# EAGLE board HighVoltageOutput (EAGLE 9.0.1)
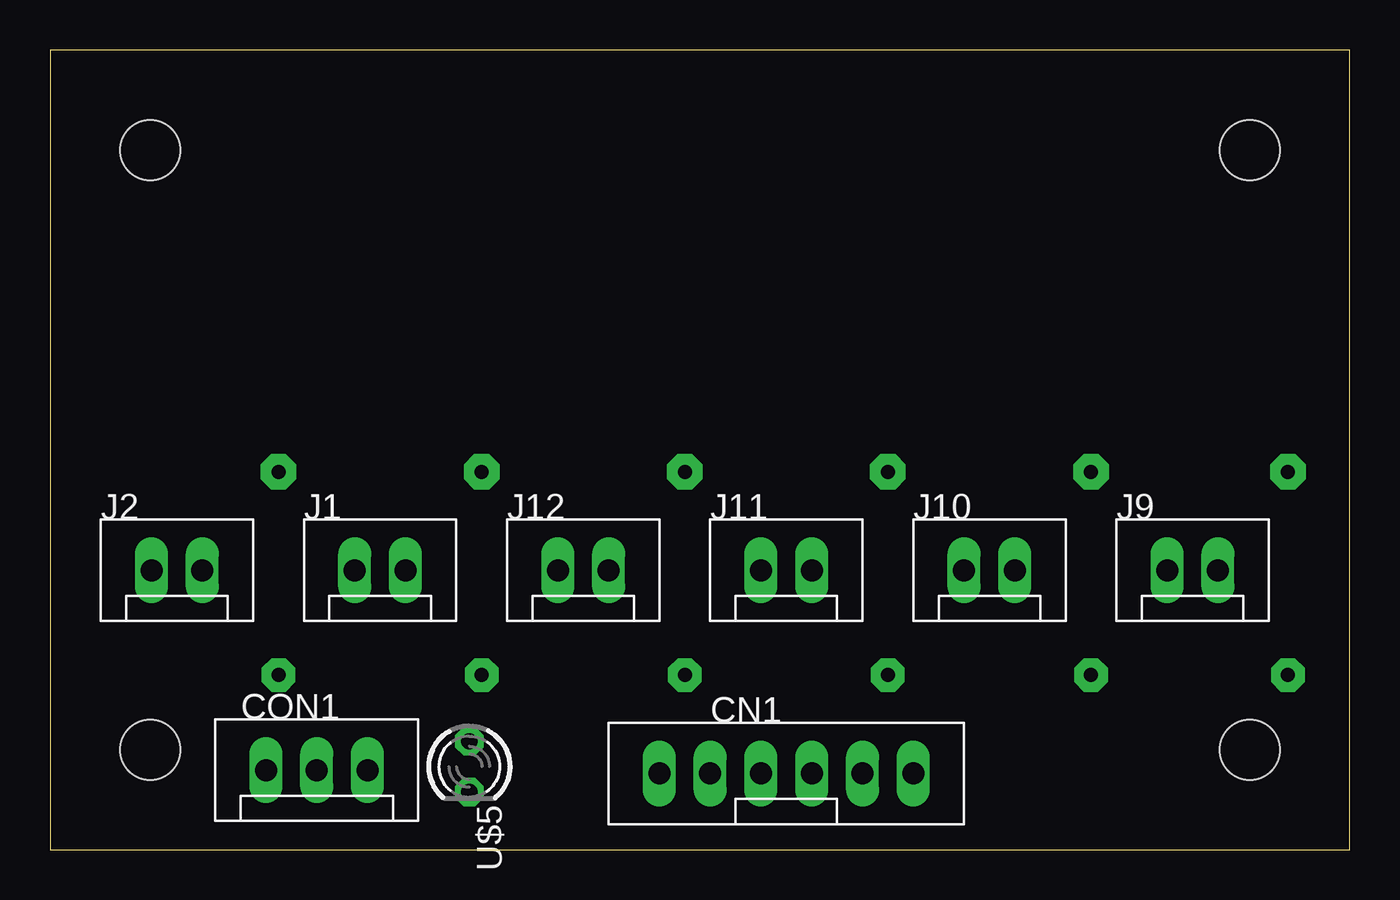
[diagram p0: board, top side]
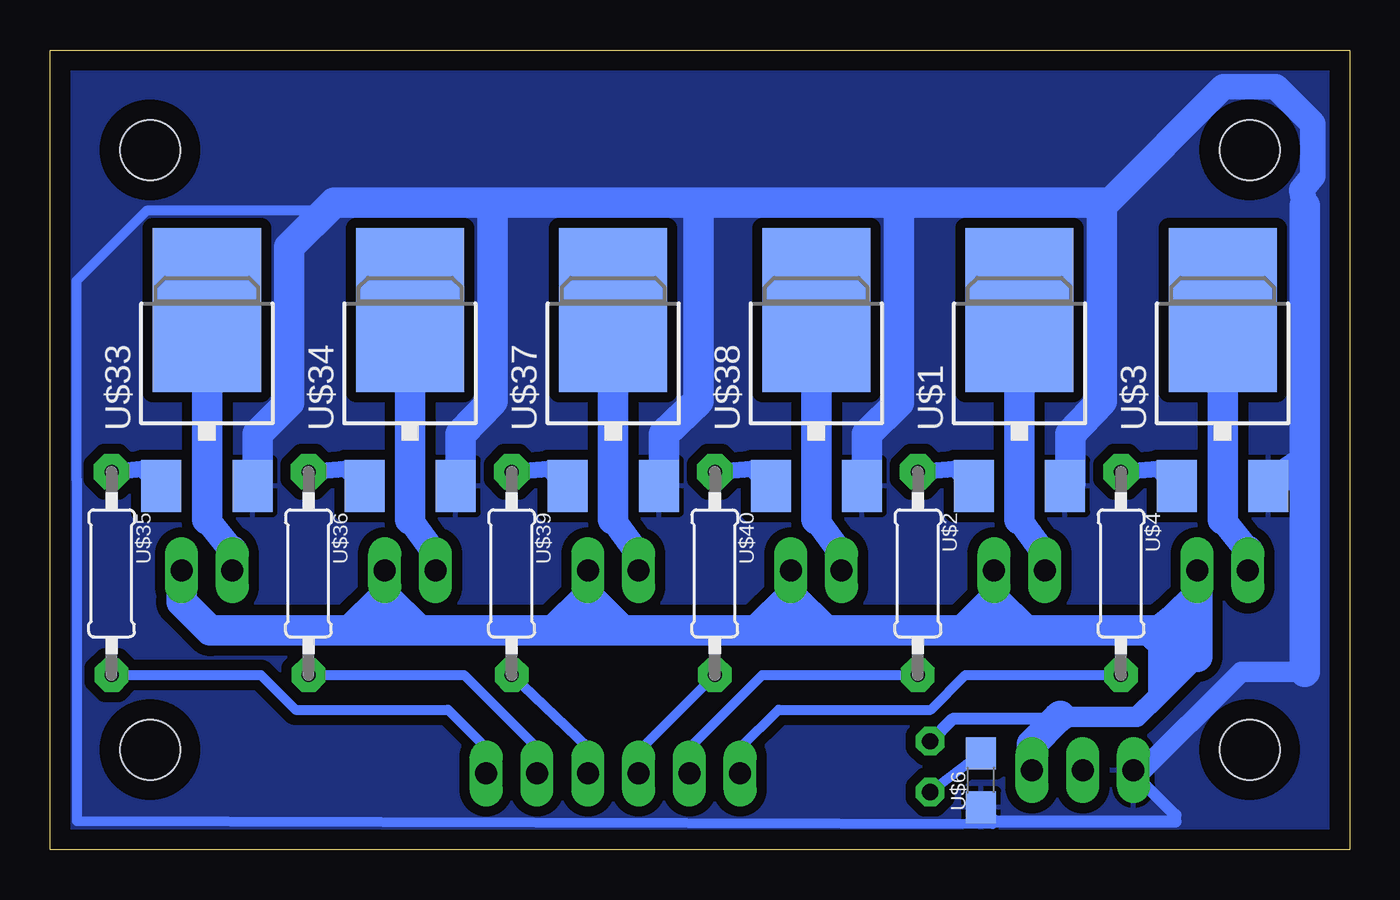
[diagram p1: board, bottom side, seen from below]

Size 65 x 40 mm. Coordinates in mm from the lower left corner, seen from the top.
Outline: 0,0 65,0 65,40 0,40 0,0
Copper layers (1*16): Top 0.035mm / dielectric 1.5mm / Bottom 0.035mm
Design rules "default *": minimum track width 6mil, minimum drill 0.35mm, track to track 20mil, track to pad 20mil, pad to pad 20mil, via to via 20mil, smd to smd 6mil, copper to edge 40mil, drill to drill 6mil, minimum pad ring 10mil, minimum via ring 8mil, stop-mask expansion 4mil, vias tented up to drill 0mil, thermal gap 10mil
Holes 3 mm at 5,5 60,5 60,35 5,35

## Footprints (pad centres in the part's own frame; a part is rotated, then mirrored left to right if it is on the bottom)
CON6 = drill 1.1 long: P$1 6.35,0; P$2 3.81,0; P$3 1.27,0; P$4 -1.27,0; P$5 -3.81,0; P$6 -6.35,0
CON3 = drill 1.1 long: P$1 2.54,0; P$2 0,0; P$3 -2.54,0
CON2 = drill 1.1 long: P$1 1.27,0; P$2 -1.27,0
TO-252FORHAND = smd 2 x 2.6: 1 -2.28,-5.3; 2 2.28,-5.3 | smd 5.4 x 8.2: 3 0,3.5
1/4W-H4_(0207/10) = drill 0.7 pad 1.778 octagon: 1 -5.08,0 | drill 0.7 pad 1.676 octagon: 2 5.08,0
LED3MM = drill 0.813 pad 1.422 octagon: A -1.27,0; K 1.27,0
0805(JIS2012)HAND = smd 1.6 x 1.5: 1 -1.35,0; 2 1.35,0

## Placement (x,y rotation side)
CN1  CON6  [CON6]  36.83,3.81 0 top
CON1  CON3  [CON3]  13.34,3.97 0 top
J1  CON2  [CON2]  16.51,13.97 0 top
J2  CON2  [CON2]  6.35,13.97 0 top
J9  CON2  [CON2]  57.15,13.97 0 top
J10  CON2  [CON2]  46.99,13.97 0 top
J11  CON2  [CON2]  36.83,13.97 0 top
J12  CON2  [CON2]  26.67,13.97 0 top
U$1  TO-252(MOS-FET_N)TO-252FORHAND  [TO-252FORHAND]  16.51,23.48 0 bottom
U$2  330  [1/4W-H4_(0207/10)]  21.59,13.81 270 bottom
U$3  TO-252(MOS-FET_N)TO-252FORHAND  [TO-252FORHAND]  6.35,23.48 0 bottom
U$4  330  [1/4W-H4_(0207/10)]  11.43,13.81 270 bottom
U$5  LED(砲弾型)3  [LED3MM]  20.97,4.15 270 top
U$6  47k  [0805(JIS2012)HAND]  18.44,3.47 90 bottom
U$33  TO-252(MOS-FET_N)TO-252FORHAND  [TO-252FORHAND]  57.15,23.48 0 bottom
U$34  TO-252(MOS-FET_N)TO-252FORHAND  [TO-252FORHAND]  46.99,23.48 0 bottom
U$35  330  [1/4W-H4_(0207/10)]  61.92,13.81 270 bottom
U$36  330  [1/4W-H4_(0207/10)]  52.07,13.81 270 bottom
U$37  TO-252(MOS-FET_N)TO-252FORHAND  [TO-252FORHAND]  36.83,23.48 0 bottom
U$38  TO-252(MOS-FET_N)TO-252FORHAND  [TO-252FORHAND]  26.67,23.48 0 bottom
U$39  330  [1/4W-H4_(0207/10)]  41.91,13.81 270 bottom
U$40  330  [1/4W-H4_(0207/10)]  31.75,13.81 270 bottom

## Library data of the parts
CN1 CON1 J1 J2 J9-J12 = (コネクタ)XH
U$1 U$3 U$33 U$34 U$37 U$38 = (半導体)FET＆トランジスタ
U$2 U$4 U$35 U$36 U$39 U$40 = (Foundation)抵抗
U$5 = (半導体)LED
U$6 = (Foundation)表面実装RC

## Nets
+24V: CON1.P$1 J1.P$1 J2.P$1 J9.P$1 J10.P$1 J11.P$1 J12.P$1 U$5.A
DGND: CON1.P$3 U$1.2 U$3.2 U$6.1 U$33.2 U$34.2 U$37.2 U$38.2
N$1: CN1.P$5 U$2.2
N$2: U$1.1 U$2.1
N$3: J1.P$2 U$1.3
N$4: CN1.P$6 U$4.2
N$5: U$3.1 U$4.1
N$6: J2.P$2 U$3.3
N$7: CN1.P$2 U$36.2
N$8: U$5.K U$6.2
N$25: CN1.P$1 U$35.2
N$27: CN1.P$3 U$39.2
N$28: CN1.P$4 U$40.2
N$32: U$33.1 U$35.1
N$33: U$34.1 U$36.1
N$34: J9.P$2 U$33.3
N$35: J10.P$2 U$34.3
N$36: U$37.1 U$39.1
N$37: U$38.1 U$40.1
N$38: J11.P$2 U$37.3
N$39: J12.P$2 U$38.3

## Tracks (layer width: path | path; a pad name or v marks a point on that pad's centre or on a via)
+24V
  Bottom 0.61: 14.63,6.53 19.86,6.53 U$5.A
  Bottom 1.016: 14.63,6.53 14.21,6.53 14.11,6.63 10.63,6.63 9.57,7.7 | 9.57,7.7 7.62,9.64 | 8.87,9.8 9.57,9.1 | 9.57,9.1 9.57,7.7 | 9.57,9.1 9.57,10.91 9.53,10.95
  Bottom 1.524: 8.76,11.56 7.62,12.7 J2.P$1 7.62,9.64 | 8.76,11.56 9.53,10.95 | 9.53,10.95 16.19,10.95 | 16.19,10.95 17.78,12.54 | 17.78,12.54 19.37,10.95 | 19.37,10.95 26.19,10.95 | 26.19,10.95 27.94,12.7 | 27.94,12.7 J12.P$1 27.94,11.11 27.62,10.95 | 27.94,12.7 29.69,10.95 | 29.69,10.95 36.35,10.95 | 36.35,10.95 38.1,12.7 | 38.1,12.7 J11.P$1 38.1,11.11 38.42,10.95 | 38.1,12.7 39.85,10.95 | 39.85,10.95 46.51,10.95 | 46.51,10.95 48.26,12.7 | 48.26,12.7 J10.P$1 48.26,10.95 | 48.26,12.7 50.01,10.95 | 50.01,10.95 56.98,10.95 58.42,12.39 J9.P$1 | 9.68,10.64 9.53,10.95 | 16.19,10.95 18.25,10.95 | 18.25,10.95 19.37,10.95 | 26.19,10.95 27.62,10.95 | 27.62,10.95 29.69,10.95 | 36.35,10.95 38.42,10.95 | 38.42,10.95 39.85,10.95 | 50.01,10.95 48.26,10.95 | 48.26,10.95 46.51,10.95 | J1.P$1 17.78,12.54 | 17.78,12.54 17.78,11.11 18.25,10.95 | CON1.P$1 15.88,5.27 14.63,6.53 14.47,6.69 | 9.41,10.68 9.53,10.95 | 8.76,11.56 8.76,9.85 8.71,9.8 8.87,9.8
DGND
  Bottom 0.508: 50.8,32.37 51.21,31.95 60.17,31.95 63.68,28.45 63.68,18.51 63.66,18.49 63.66,1.43 17.84,1.28
  Bottom 0.61: U$6.1 17.77,1.4 8.71,1.4 8.71,1.72 10.65,3.66 CON1.P$3
  Bottom 1.016: 2.23,8.89 5.42,8.89 10.65,3.66
  Bottom 1.27: 2.23,32.21 2.38,33 1.85,33.7 1.85,36.3 3.69,38.15 6.3,38.15 12.09,32.37 12.39,32.37
  Bottom 1.524: U$33.2 54.61,18.32 54.61,20.79 53.03,22.37 53.03,30.14 50.8,32.37 42.87,32.37 | 42.87,32.37 42.87,22.44 44.45,20.79 44.45,18.32 U$34.2 | 42.87,32.37 32.55,32.37 | 32.55,32.37 32.55,22.44 34.29,20.79 34.29,18.32 U$37.2 | 32.55,32.37 22.55,32.37 | 22.55,32.37 22.55,22.37 24.13,20.79 24.13,18.32 U$38.2 | 22.55,32.37 12.39,32.37 12.39,22.44 13.97,20.79 13.97,18.32 U$1.2 | 2.23,19.43 2.23,32.21 | 2.23,19.43 U$3.2 | 2.23,19.43 2.23,8.89
  pour Bottom: 0,0 0,40 65,40 65,0
N$1
  Bottom 0.508: CN1.P$5 33.02,5.08 29.37,8.73 U$2.2
N$2
  Bottom 0.813: U$2.1 19.78,19.05 U$1.1
N$3
  Bottom 1.27: 15.24,14.77 16.51,16.51
  Bottom 1.524: J1.P$2 15.24,14.77 | 16.51,16.51 U$1.3
N$4
  Bottom 0.508: CN1.P$6 30.48,5.08 28.56,7 20.94,7 19.21,8.73 U$4.2
N$5
  Bottom 0.813: U$4.1 9.62,19.05 U$3.1
N$6
  Bottom 1.27: 6.35,16.51 5.08,14.93
  Bottom 1.524: U$3.3 6.35,16.51 | 5.08,14.93 J2.P$2
N$7
  Bottom 0.508: U$36.2 44.29,8.73 40.64,5.08 CN1.P$2
N$8
  Bottom 0.508: U$5.K U$6.2
N$25
  Bottom 0.508: U$35.2 54.45,8.73 52.72,7 45.1,7 43.18,5.08 CN1.P$1
N$27
  Bottom 0.508: U$39.2 38.1,5.08 CN1.P$3
N$28
  Bottom 0.508: CN1.P$4 35.56,4.92 U$40.2
N$32
  Bottom 0.813: U$35.1 60.42,19.05 U$33.1
N$33
  Bottom 0.813: U$36.1 50.26,19.05 U$34.1
N$34
  Bottom 1.27: 57.15,16.51 55.88,14.93
  Bottom 1.524: U$33.3 57.15,16.51 | 55.88,14.93 J9.P$2
N$35
  Bottom 1.27: 46.99,16.51 45.72,14.77
  Bottom 1.524: U$34.3 46.99,16.51 | 45.72,14.77 J10.P$2
N$36
  Bottom 0.813: U$39.1 40.1,19.05 U$37.1
N$37
  Bottom 0.813: U$40.1 29.94,19.05 U$38.1
N$38
  Bottom 1.27: 36.83,16.51 35.56,14.77
  Bottom 1.524: U$37.3 36.83,16.51 | 35.56,14.77 J11.P$2
N$39
  Bottom 1.27: 26.67,16.51 25.4,14.77
  Bottom 1.524: U$38.3 26.67,16.51 | 25.4,14.77 J12.P$2